# Altium PCB Controlled Voltage Gain.PcbDoc
Units mil, origin at the board's own origin, x right, y up, seen from the top; angles counter-clockwise.
Board outline 3149.61 x 1929.13 mil, 2 copper layers (Top Layer, Bottom Layer); 27 components, 18 nets, 73 pads, 6 vias.
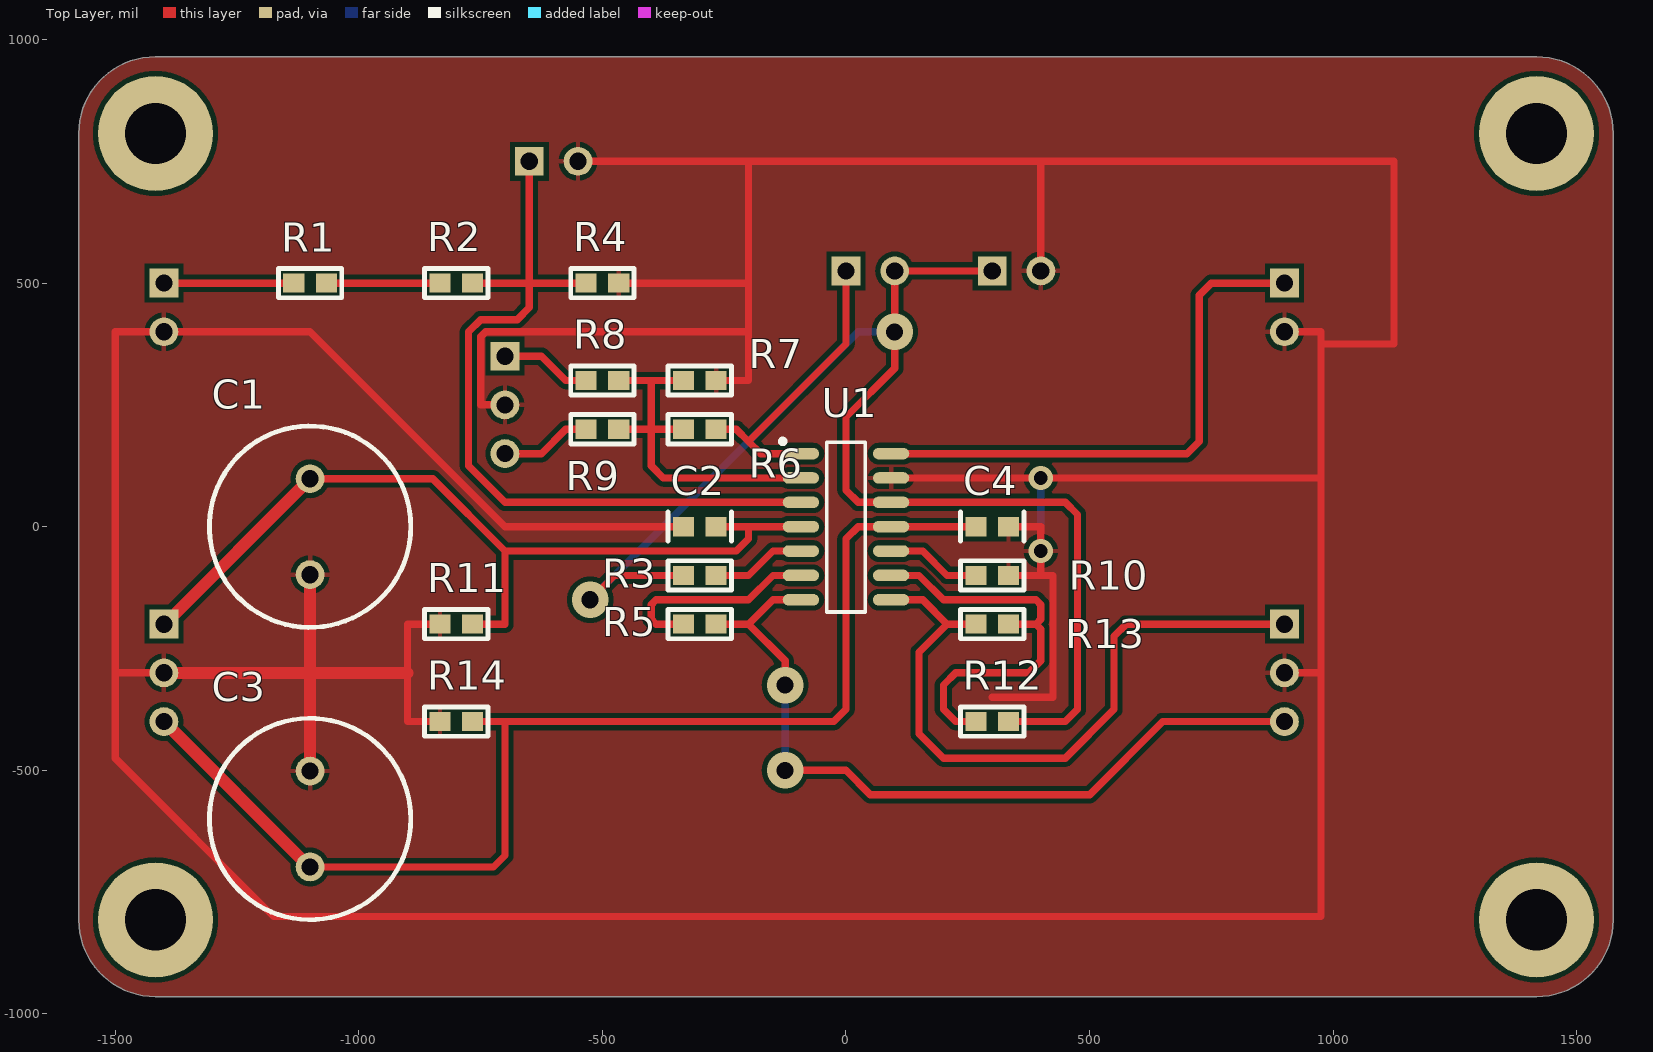
[diagram p0: Top Layer view]
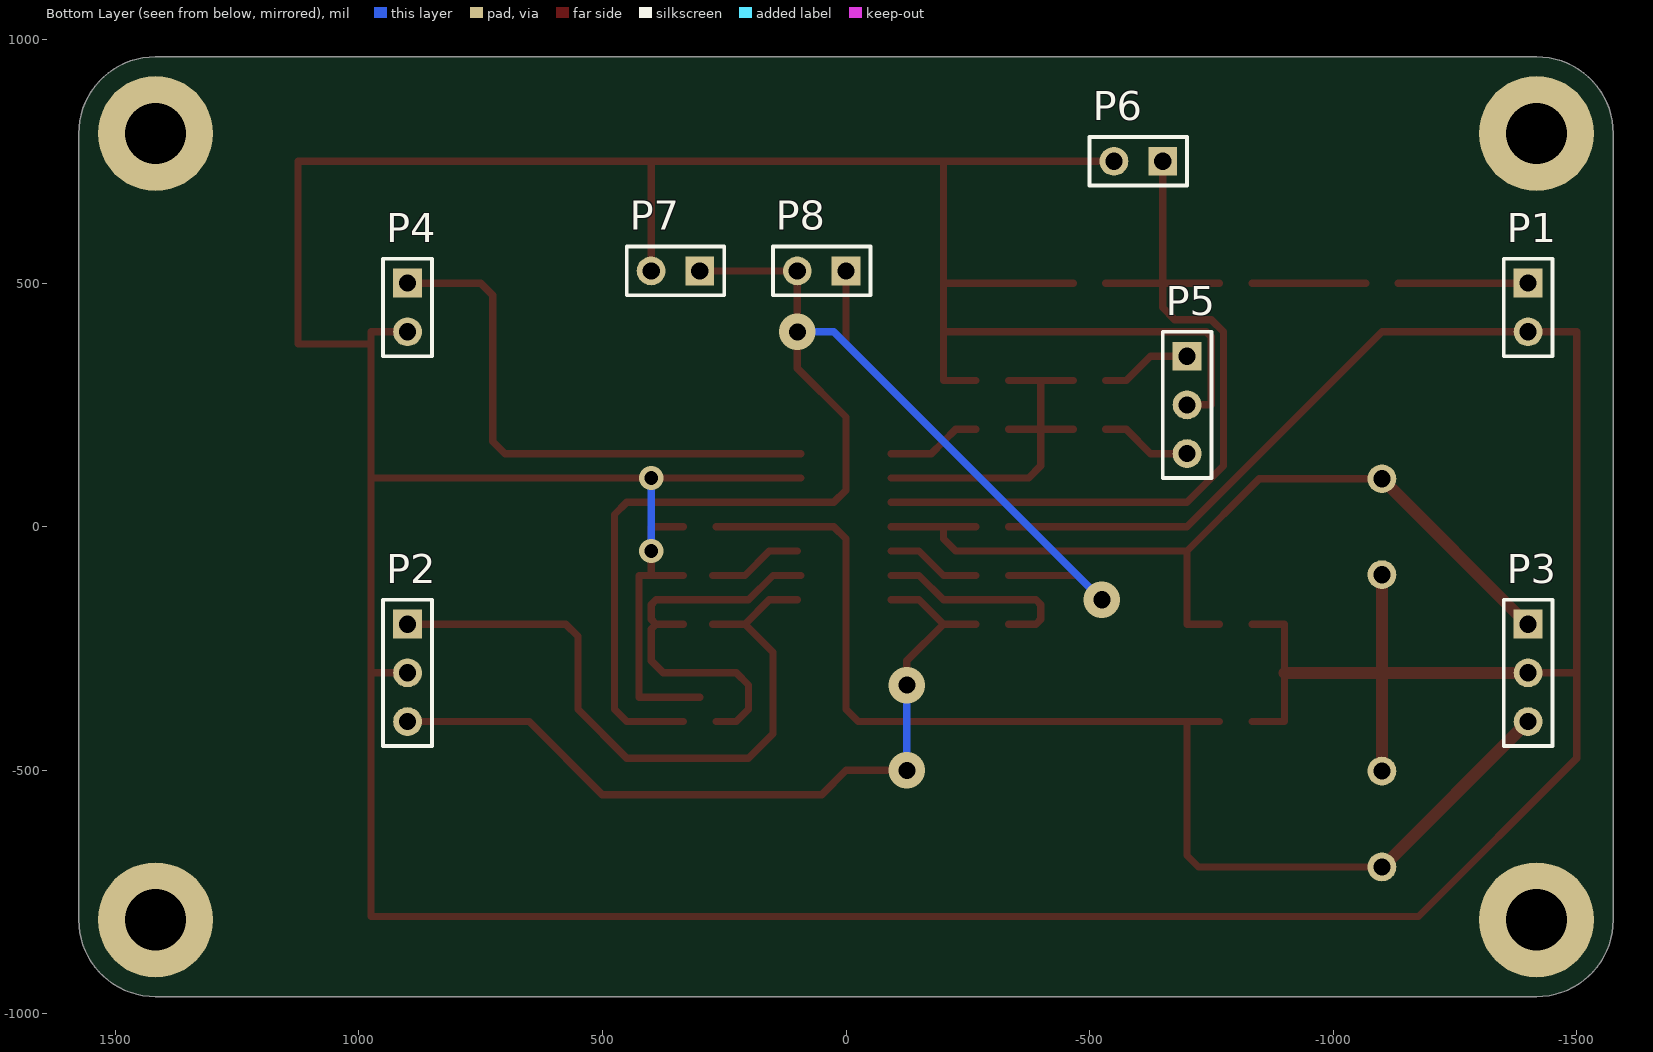
[diagram p1: Bottom Layer view, seen from below]

## Layer stack, top to bottom
Top Layer: signal copper 1.4
Dielectric: dielectric 12.6, FR-4, Dk 4.8
Bottom Layer: signal copper 1.4

## Board outline
-1574.8,-807.09 -1574.8,807.09 cw(c-1417.32,807.09) -1417.32,964.57 1417.32,964.57 cw(c1417.32,807.09) 1574.8,807.09 1574.8,-807.09 cw(c1417.32,-807.09) 1417.32,-964.57 -1417.32,-964.57 cw(c-1417.32,-807.09)

## Design rules (kind name [scope] priority, off if disabled: settings)
Clearance [All] p1: gap=10
PolygonConnect [All] p1: connectstyle=Relief reliefconductorwidth=10 reliefentries=4 polygonreliefangle="90 Angle" airgapwidth=10
RoomDefinition "Controlled Voltage Gain" [InComponentClass('Controlled Voltage Gain')] p1: confinementstyle=ConfineIn formatcopy=TRUE lockcomponents=FALSE outline -1600,-1000 1600,-1000 1600,1000 -1600,1000
RoutingVias [All] p1: holewidth=28 width=50 viastyle="Through Hole" minholewidth=12 minwidth=12 maxholewidth=150 maxwidth=150
SolderMaskExpansion [All] p1: expansion=4
Width [All] p1: maxlimit=150 minlimit=10 preferedwidth=10
28 further rules are at their usual default settings.

## Components (designator, comment, footprint, x,y, rotation, side; value= is the part's Value field where it differs from the comment)
C1 "100uF" RB5-10.5 -1100,0 r270 top
C2 "100nF" "CAP (3D) - 0603" -300,0 r0 top
C3 "100uF" RB5-10.5 -1100,-600 r270 top
C4 "100nF" "CAP (3D) - 0603" 300,0 r0 top
P1 "Header 2" HDR1X2 -1400,500 r270 bottom
P2 "Header 3" HDR1X3 900,-200 r270 bottom
P3 "Header 3" HDR1X3 -1400,-200 r270 bottom
P4 "Header 2" HDR1X2 900,500 r270 bottom
P5 "Header 3" HDR1X3 -700,350 r270 bottom
P6 "Header 2" HDR1X2 -650,750 r0 bottom
P7 "Header 2" HDR1X2 300,525 r0 bottom
P8 "Header 2" HDR1X2 0,525 r0 bottom
R1 "9M1" "RES (3D) - 0603" -1100,500 r0 top
R2 "470k" "RES (3D) - 0603" -800,500 r180 top
R3 "10k" "RES (3D) - 0603" -300,-100 r180 top
R4 "430k" "RES (3D) - 0603" -500,500 r180 top
R5 "10k" "RES (3D) - 0603" -300,-200 r180 top
R6 "100k" "RES (3D) - 0603" -300,200 r0 top
R7 "100k" "RES (3D) - 0603" -300,300 r0 top
R8 "24k" "RES (3D) - 0603" -500,300 r180 top
R9 "11k" "RES (3D) - 0603" -500,200 r180 top
R10 "10k" "RES (3D) - 0603" 300,-100 r0 top
R11 "100k" "RES (3D) - 0603" -800,-200 r180 top
R12 "10k" "RES (3D) - 0603" 300,-400 r0 top
R13 "10k" "RES (3D) - 0603" 300,-200 r0 top
R14 "100k" "RES (3D) - 0603" -800,-400 r0 top
U1 "MCP6L04" SO-14 0,0 r0 top

## Footprints (in the part's own frame and the unit in brackets; to place one, negate y for a bottom-side part, rotate by r counter-clockwise, add the part's x,y. Pads: shape width x height; smd on the part's side, far side on the other; paste and mask are expansions set on the pad)
"CAP (3D) - 0603" [mm]
  rect 1.1x1 smd: 1(0.85,0) 2(-0.85,0)
  silkscreen extent -1.65,-0.76 1.65,0.76, body extent -0.8,-0.4 0.8,0.4, height 0.92
HDR1X2 [mm] "Connector; Header; 2 Position"
  rect 1.5x1.5 hole 0.9: 1(0,0)
  round 1.5 hole 0.9: 2(2.54,0)
  silkscreen extent -1.27,-1.27 3.81,1.27
HDR1X3 [mm] "Connector; Header; 3 Position"
  rect 1.5x1.5 hole 0.9: 1(0,0)
  round 1.5 hole 0.9: 2(2.54,0) 3(5.08,0)
  silkscreen extent -1.27,-1.27 6.35,1.27
RB5-10.5 [mm] "Capacitor (Radial); 2 Leads"
  round 1.5 hole 0.9: 1(-2.5,0) 2(2.5,0)
  silkscreen extent -5.25,-5.25 5.25,5.25
"RES (3D) - 0603" [mm]
  rect 1.1x1 smd: 1(0.85,0) 2(-0.85,0)
  silkscreen extent -1.65,-0.76 1.65,0.76, body extent -0.8,-0.4 0.8,0.4, height 0.92
SO-14 [mm] "SOIC, 8-Leads, Body 4.9x3.9mm, Pitch 1.27mm, IPC High Density"
  oval 1.9x0.6 smd: 1(-2.35,3.81) 2(-2.35,2.54) 3(-2.35,1.27) 4(-2.35,0) 5(-2.35,-1.27) 6(-2.35,-2.54) 7(-2.35,-3.81) 8(2.35,-3.81) 9(2.35,-2.54) 10(2.35,-1.27) 11(2.35,0) 12(2.35,1.27) 13(2.35,2.54) 14(2.35,3.81)
  silkscreen extent -3.42,-4.44 1,4.57, body extent -3.1,-4.37 3.1,4.37, height 1.77

## Part data
C1 C3: library part "Cap Pol", "CAPACITOR POLARISED TAG B CASE"
C2 C4: library part CAP, "CAPACITOR SMD 0603"
P1 P4 P6 P7 P8: "Header, 2-Pin"
P2 P3 P5: "Header, 3-Pin"
R1 R2 R3 R4 R5 R6 R7 R8 R9 R10 R11 R12 R13 R14: library part "RES SMD 0603 10k", "RESISTOR SMD 0603 10k"

## Free pads (board coordinates)
  round 236.22 hole 125.98: 0(-1417.32,-807.09) 0(-1417.32,807.09) 0(1417.32,-807.09) 0(1417.32,807.09)

## Via types
v1: diameter 75, hole 35, Top Layer to Bottom Layer, 4 vias
v2: diameter 50, hole 28, Top Layer to Bottom Layer, 2 vias

## Nets (pads, with @x,y where several pads share a name; then routed paths per layer and width w, separated by ;. In a path a pad name is that pad's centre, name@x,y a point inside that pad or via, vN(x,y) a via of type N, cw(c..) or ccw(c..) an arc to the next point about the centre after c; other vN are vias at no path point)
FOUT: P4.1 U1.14 | length 1128.2
  Top Layer w15: U1.14 700,150 725,175 725,475 750,500 P4.1
GND: C1.2 C2.2 C3.1 C4.1 P1.2 P2.2 P3.2 P4.2 P5.2 P6.2 P7.2 R4.2 R7.1 R10.1 R11.1 R14.2 U1.13 | length 13120.6
  Top Layer w15: P3.2 -1500,-300 ; R14.2 -900,-400 -900,-300 -900,-200 R11.1 ; P5.2 -750,250 -750,389.64 -739.64,400 -200,400 ; P6.2 -200,750 ; R4.2 -200,500 ; C2.2 -700,0 -1100,400 P1.2 -1500,400 -1500,-300 ; R7.1 -200,300 -200,400 ; U1.13 v2(400,100) 975,100 ; 300,-350 425,-350 425,-100 400,-100 ; R10.1 400,-100 ; C4.1 400,0 v2(400,-50) 400,-100 ; P7.2 400,750 ; P2.2 975,-300 ; P4.2 975,400 975,375 ; -1500,-300 -1500,-475 -1175,-800 975,-800 975,-300 ; -200,400 -200,500 ; -200,500 -200,750 ; -200,750 400,750 ; 400,750 1125,750 1125,375 975,375 ; 975,-300 975,100 ; 975,100 975,375
  Top Layer w25: P3.2 -1100,-300 ; C3.1 -1100,-300 ; C1.2 -1100,-300 ; -900,-300 -1100,-300
  Bottom Layer w15: v2(400,-50) v2(400,100)
NetP7_1: P7.1 P8.2 R3.1 R12.1 U1.12 | length 2804.1
  Top Layer w15: v1(-525,-150) -475,-100 R3.1 ; P7.1 P8.2 v1(100,400) 100,325 0,225 0,75 25,50 U1.12 450,50 475,25 475,-375 450,-400 R12.1
  Bottom Layer w15: v1(-525,-150) 25,400 v1(100,400)
NetP8_1: P8.1 R6.1 U1.1 | length 627.6
  Top Layer w15: R6.1 -225,200 -200,175 ; U1.1 -175,150 -200,175 ; P8.1 0,375 -200,175
NetR1_1: R1.1 R2.1 | length 233.1
  Top Layer w15: R1.1 R2.1
NetR3_2: R3.2 U1.5 | length 194.7
  Top Layer w15: R3.2 -200,-100 -150,-50 U1.5
NetR5_1: R5.1 U1.6 | length 433
  Top Layer w15: R5.1 -390,-200 -400,-190 -400,-160 -390,-150 -200,-150 -150,-100 U1.6
NetR6_2: R6.2 R7.2 R8.2 R9.2 U1.2 | length 759
  Top Layer w15: R9.2 -400,200 ; R8.2 -400,300 ; R6.2 -400,200 ; R7.2 -400,300 ; U1.2 -375,100 -400,125 -400,200 ; -400,200 -400,300
NetR10_2: R10.2 U1.10 | length 194.7
  Top Layer w15: U1.10@100,-50 157.48,-50 207.48,-100 R10.2@274.02,-100
NetR12_2: R12.2 R13.1 U1.9 | length 859.8
  Top Layer w15: U1.9 150,-100 200,-150 390,-150 400,-160 400,-190 390,-200 ; R12.2 225,-400 200,-375 200,-325 225,-300 375,-300 400,-275 400,-210 390,-200 ; R13.1 390,-200
VCC: C1.1 C2.1 P3.1 R11.2 U1.4 | length 1811
  Top Layer w15: C1.1 -848.43,98.43 -700,-50 ; R11.2 -700,-200 -700,-50 ; C2.1 -200,0 ; U1.4 -200,0 ; -700,-50 -225,-50 -200,-25 -200,0
  Top Layer w25: P3.1 -1398.43,-200 C1.1
VEE: C3.2 C4.2 P3.3 R14.1 U1.11 | length 2512.1
  Top Layer w15: C3.2 -723.43,-698.43 -700,-675 -700,-400 ; R14.1 -700,-400 ; C4.2 U1.11 25,0 0,-25 0,-375 -25,-400 -700,-400
  Top Layer w25: P3.3 -1101.57,-698.43 C3.2
VIN: P1.1 R1.2 | length 266.5
  Top Layer w15: P1.1 R1.2
VOUT(+): P2.3 R5.2 U1.7 | length 1633.6
  Top Layer w15: R5.2 -200,-200 ; v1(-125,-500) 0,-500 50,-550 500,-550 650,-400 P2.3 ; v1(-125,-325) -125,-275 -200,-200 ; U1.7 -150,-150 -200,-200
  Bottom Layer w15: v1(-125,-500) v1(-125,-325)
VOUT(-): P2.1 R13.2 U1.8 | length 1416
  Top Layer w15: U1.8@100,-150 157.48,-150 207.48,-200 ; R13.2@274.02,-200 R13.2 207.48,-200 ; P2.1 575,-200 550,-225 550,-375 450,-475 200,-475 150,-425 150,-257.48 207.48,-200
VSAMPLE: P6.1 R2.2 R4.1 U1.3 | length 1667.3
  Top Layer w15: R2.2 -650,500 ; P6.1 -650,500 ; R4.1 -650,500 ; U1.3 -700,50 -775,125 -775,400 -750,425 -675,425 -650,450 -650,500
X10: P5.1 R8.1 | length 187.2
  Top Layer w15: P5.1 -625,350 -575,300 R8.1
X100: P5.3 R9.1 | length 187.2
  Top Layer w15: P5.3 -625,150 -575,200 R9.1

## Polygon pours and split planes (outlines as drawn)
GND on Top Layer "Mechanical 3-No Net" (solid, pour order 2): -1574.8,-807.09 -1574.8,807.09 cw(c-1417.32,807.09) -1417.32,964.57 1417.32,964.57 cw(c1417.32,807.09) 1574.8,807.09 1574.8,-807.09 cw(c1417.32,-807.09) 1417.32,-964.57 -1417.32,-964.57 cw(c-1417.32,-807.09)

## Silkscreen, mask and mechanical layers (free items; w line width, h text height)
Mechanical 1:
  the board outline again, w10